# EAGLE board afron_atmega328_chassis_SMD (EAGLE 6.1)
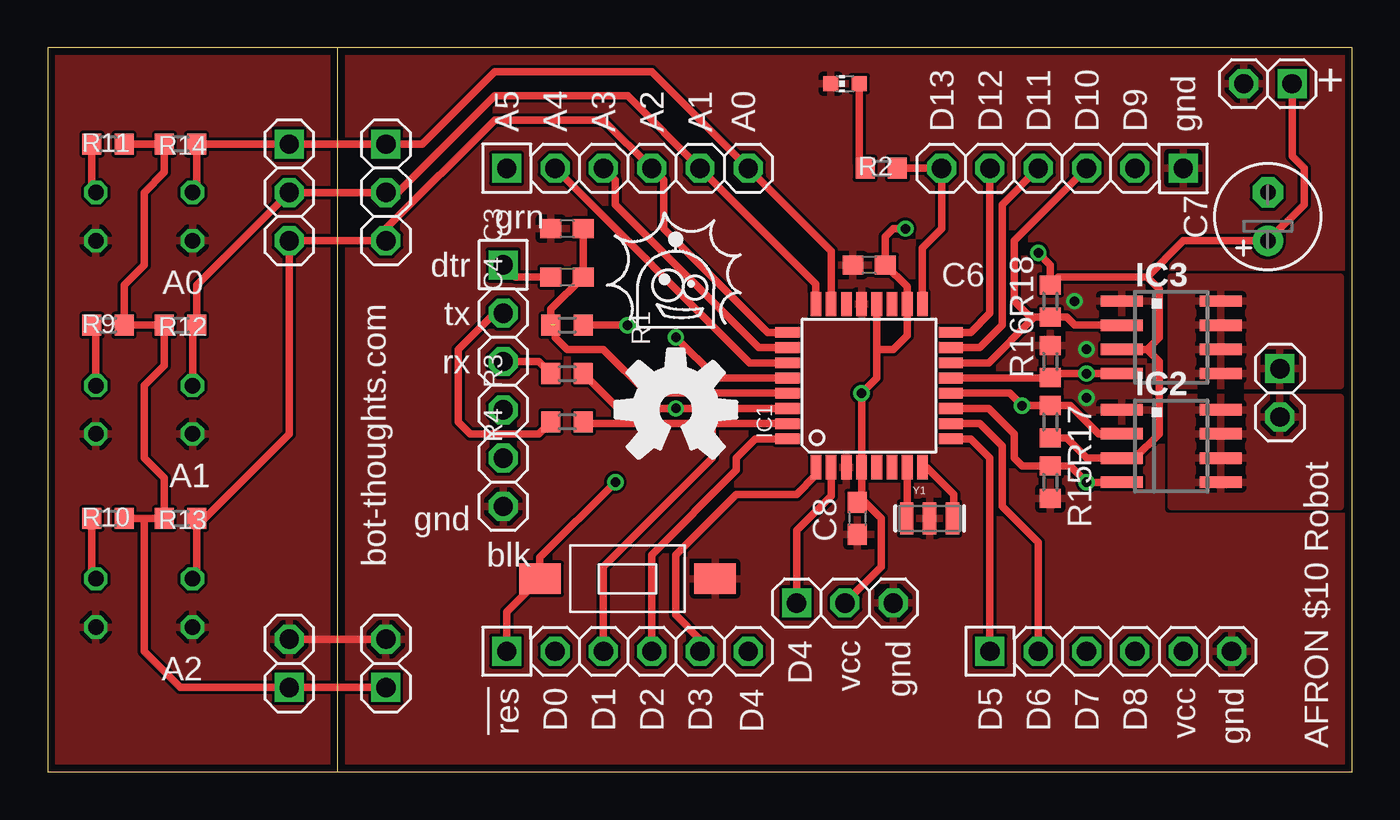
[diagram p0: board, top side]
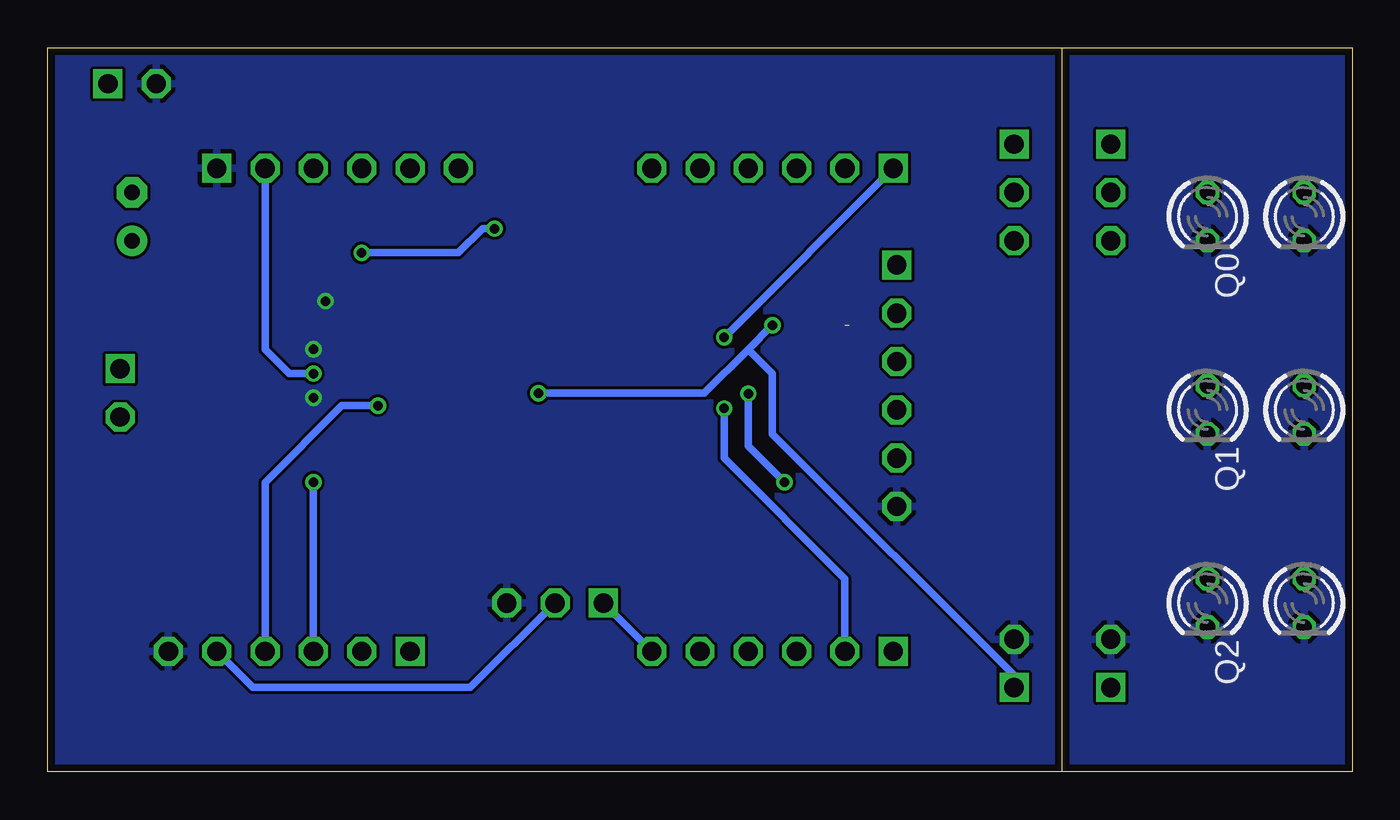
[diagram p1: board, bottom side, seen from below]

Size 68.58 x 38.1 mm. Coordinates in mm from the lower left corner, seen from the top.
Outline: 15.24,38.1 68.58,38.1 68.58,0 15.24,0
Outline: 15.24,38.1 0,38.1 0,0 15.24,0
Outline: 15.24,0 15.24,38.1
Copper layers (1*16): Top 0.0356mm / dielectric 1.5011mm / Bottom 0.0356mm
Design rules: minimum track width 6mil, minimum drill 13mil, track to track 6mil, track to pad 6mil, pad to pad 6mil, via to via 6mil, smd to smd 6mil, copper to edge 15mil, drill to drill 6mil, minimum pad ring 7mil, minimum via ring 7mil, stop-mask expansion 4mil, vias tented up to drill 0mil, thermal gap 10mil

## Footprints (pad centres in the part's own frame; a part is rotated, then mirrored left to right if it is on the bottom)
C0603 = smd 1.1 x 1: 1 -0.85,0; 2 0.85,0
E2,5-6 = drill 0.813 pad 1.6: + -1.27,0 | drill 0.813 pad 1.6 octagon: - 1.27,0
TQFP32-08 = smd 1.27 x 0.559: 1 -4.293,2.8; 2 -4.293,2; 3 -4.293,1.2; 4 -4.293,0.4; 5 -4.293,-0.4; 6 -4.293,-1.2; 7 -4.293,-2; 8 -4.293,-2.8; 17 4.293,-2.8; 18 4.293,-2; 19 4.293,-1.2; 20 4.293,-0.4; 21 4.293,0.4; 22 4.293,1.2; 23 4.293,2; 24 4.293,2.8 | smd 0.559 x 1.27: 9 -2.8,-4.293; 10 -2,-4.293; 11 -1.2,-4.293; 12 -0.4,-4.293; 13 0.4,-4.293; 14 1.2,-4.293; 15 2,-4.293; 16 2.8,-4.293; 25 2.8,4.293; 26 2,4.293; 27 1.2,4.293; 28 0.4,4.293; 29 -0.4,4.293; 30 -1.2,4.293; 31 -2,4.293; 32 -2.8,4.293
SOIC8 = smd 0.6 x 2.2: 1 -1.905,-2.6; 2 -0.635,-2.6; 3 0.635,-2.6; 4 1.905,-2.6; 5 1.905,2.6; 6 0.635,2.6; 7 -0.635,2.6; 8 -1.905,2.6
1X06-S = drill 1.016 square: 1 -6.35,0 | drill 1.016 octagon: 2 -3.81,0; 3 -1.27,0; 4 1.27,0; 5 3.81,0; 6 6.35,0
1X02-S = drill 1.016 square: 1 -1.27,0 | drill 1.016 octagon: 2 1.27,0
1X03-S = drill 1.016 square: 1 -2.54,0 | drill 1.016 octagon: 2 0,0; 3 2.54,0
LED3MM = drill 0.813 octagon: A -1.27,0; K 1.27,0
CHIP-LED0603 = smd 0.8 x 0.8: A 0,-0.75; C 0,0.75
R0603 = smd 1 x 1.1: 1 -0.85,0; 2 0.85,0
6MMTACTTILE_RECT_SMD = smd 2.19 x 1.6: P$1 -4.6,0; P$2 4.6,0
RESONATOR-SMD = smd 0.7 x 1.7: 1 -1.2,0; 2 0,0; 3 1.2,0

## Placement (x,y rotation side)
C3  0.1uF  [C0603]  27.3,28.57 180 top
C4  0.1uF  [C0603]  27.3,26.04 0 top
C6  0.1uF  [C0603]  43.18,26.67 180 top
C7  10uF  [E2,5-6]  64.14,29.21 90 top
C8  0.1uF  [C0603]  42.55,13.34 270 top
IC1  ATMEGA168-AU  [TQFP32-08]  43.18,20.32 90 top
IC2  FDS9934C  [SOIC8]  59.05,17.14 270 top
IC3  FDS9934C  [SOIC8]  59.05,22.86 270 top
J1  D  [1X06-S]  30.48,6.35 0 top
J2  C  [1X06-S]  55.88,6.35 0 top
J3  B  [1X06-S]  53.34,31.75 180 top
J4  A  [1X06-S]  30.48,31.75 0 top
J5  FTDI  [1X06-S]  23.95,20.32 270 top
JP1  PWR  [1X02-S]  12.7,5.71 90 top
JP2  MOT  [1X02-S]  64.77,19.94 270 top
JP3  SENS  [1X03-S]  12.7,30.48 270 top
JP4  PWR  [1X02-S]  64.14,36.2 180 top
JP5  SRV  [1X03-S]  41.91,8.89 0 top
JP6  PWR  [1X02-S]  17.78,5.71 90 top
JP7  SENS  [1X03-S]  17.78,30.48 270 top
LED0  [LED3MM]  2.54,29.21 270 bottom
LED1  [LED3MM]  2.54,19.05 270 bottom
LED2  [LED3MM]  2.54,8.89 270 bottom
LED4  [CHIP-LED0603]  41.91,36.2 90 top
Q0  [LED3MM]  7.62,29.21 270 bottom
Q1  [LED3MM]  7.62,19.05 270 bottom
Q2  [LED3MM]  7.62,8.89 270 bottom
R1  1K  [R0603]  27.3,23.5 0 top
R2  100  [R0603]  43.81,31.75 0 top
R3  1K  [R0603]  27.3,20.95 0 top
R4  1K  [R0603]  27.3,18.41 0 top
R9  100  [R0603]  3.17,23.5 0 top
R10  100  [R0603]  3.17,13.34 0 top
R11  100  [R0603]  3.17,33.02 0 top
R12  10K  [R0603]  6.99,23.5 180 top
R13  10K  [R0603]  6.99,13.34 180 top
R14  10K  [R0603]  6.99,33.02 180 top
R15  10K  [R0603]  52.7,15.24 270 top
R16  10K  [R0603]  52.7,21.59 90 top
R17  10K  [R0603]  52.7,18.41 270 top
R18  10K  [R0603]  52.7,24.77 90 top
S1  RESET  [6MMTACTTILE_RECT_SMD]  30.48,10.16 180 top
Y1  4MHz  [RESONATOR-SMD]  46.35,13.34 0 top

## Library data of the parts
C3 C4 C6-C8 = rcl
IC1 = Arduino-AVR
IC2 IC3 = mes_motor_driver
J1-J5 JP1-JP7 = pinhead-2
LED0 LED1 LED2 LED4 = led
Q0 Q1 Q2 = mes_opto
R1-R4 R9-R18 = resistor
S1 = mes_electromech
Y1 = SparkFun

## Nets
!RESET: C3.1 C4.2 IC1.29 J1.1 R1.1 S1.P$2
A0: IC1.23 J4.6 JP3.1 JP7.1 Q0.A R14.1
A1: IC1.24 J4.5 JP3.2 JP7.2 Q1.A R12.1
A2: IC1.25 J4.4 JP3.3 JP7.3 Q2.A R13.1
A3: IC1.26 J4.3
A4: IC1.27 J4.2
A5: IC1.28 J4.1
D0: IC1.30 J1.2 R3.2
D1: IC1.31 J1.3 R4.2
D2: IC1.32 J1.4
D3: IC1.1 J1.5
D4: IC1.2 J1.6 JP5.1
D5: IC1.9 J2.1
D6: IC1.10 J2.2
D7: IC1.11 IC2.4 J2.3 R15.1
D8: IC1.12 IC2.2 J2.4 R17.1
D9: IC1.13 IC3.4 J3.2 R16.1
D10: IC1.14 IC3.2 J3.3 R18.1
D11: IC1.15 J3.4
D12: IC1.16 J3.5
D13: IC1.17 J3.6 R2.2
GND: C3.2 C6.2 C8.2 IC1.3 IC1.21 IC2.1 IC3.1 J2.6 J3.1 J5.6 JP1.2 JP4.2 JP5.3 JP6.2 LED0.K LED1.K LED2.K LED4.C Q0.K Q1.K Q2.K R15.2 R16.2 S1.P$1 Y1.2
GND2: IC1.5
MA: IC2.5 IC2.6 IC2.7 IC2.8 JP2.2
MB: IC3.5 IC3.6 IC3.7 IC3.8 JP2.1
N$1: LED0.A R11.1
N$2: IC1.7 Y1.1
N$3: IC1.8 Y1.3
N$4: C4.1 J5.1
N$5: LED2.A R10.1
N$6: LED4.A R2.1
N$7: LED1.A R9.1
RX: J5.3 R3.1
TX: J5.2 R4.1
VCC: C6.1 C8.1 IC1.4 IC1.18 IC1.20 IC2.3 IC3.3 J2.5 JP1.1 JP4.1 JP5.2 JP6.1 R1.2 R9.2 R10.2 R11.2 R12.2 R13.2 R14.2 R17.2 R18.2
VCC2: IC1.6

## Tracks (layer width: path | path; a pad name or v marks a point on that pad's centre or on a via)
!RESET  (via drill 0.5)  (1 unrouted)
  Top 0.406: C3.1 C4.2 26.45,24.34 R1.1 | IC1.29 31.73,19.92 | 31.73,19.92 31.52,19.92 29.21,22.23 27.3,22.23 26.67,22.86 26.67,23.5 | J1.1 24.13,8.41 S1.P$2 25.88,11.28 v29.84,15.24 | v31.75,19.9 31.73,19.92
  Bottom 0.406: v29.84,15.24 31.75,17.14 v31.75,19.9
A0
  Top 0.406: Q0.A 7.83,30.7 R14.1 JP3.1 JP7.1 19.68,33.02 23.5,36.83 31.75,36.83 J4.6 41.18,27.4 IC1.23
A1
  Top 0.406: Q1.A 7.62,23.28 R12.1 7.83,25.61 JP3.2 JP7.2 18.41,30.48 23.5,35.56 30.48,35.56 J4.5 40.38,25.66 IC1.24
A2
  Top 0.406: Q2.A 7.83,10.38 R13.1 8.26,13.34 12.7,17.78 JP3.3 JP7.3 17.78,28.57 23.5,34.29 29.21,34.29 J4.4 32.38,31.11 32.38,28.57 37.84,23.12 IC1.25
A3
  Top 0.406: IC1.26 37.37,22.32 29.84,29.84 29.84,31.11 J4.3
A4
  Top 0.406: IC1.27 36.9,21.52 J4.2
A5  (via drill 0.5)
  Top 0.406: IC1.28 35.16,20.72 v33.02,22.86
  Bottom 0.406: v33.02,22.86 J4.1
D0  (via drill 0.5)
  Top 0.406: R3.2 29.99,19.12 v33.02,19.12 IC1.30
  Bottom 0.406: J1.2 26.67,10.16 33.02,16.51 v33.02,19.12
D1
  Top 0.406: IC1.31 34.92,18.32 | 34.92,18.32 28.25,18.32 R4.2 | J1.3 29.21,10.79 34.92,16.51 34.92,18.32
D2
  Top 0.406: J1.4 31.75,11.43 36.2,15.88 36.2,16.51 37.2,17.52 IC1.32
D3
  Top 0.406: J1.5 34.29,6.99 33.02,8.26 33.02,11.43 36.2,14.61 39.37,14.61 40.38,15.62 IC1.1
D4
  Top 0.406: IC1.2 41.18,14.51 39.37,12.7 JP5.1
  Bottom 0.406: J1.6 JP5.1
D5
  Top 0.406: IC1.9 48.52,17.52 49.53,16.51 J2.1
D6
  Top 0.406: IC1.10 48.99,18.32 50.16,17.14 50.16,13.97 52.07,12.06 J2.2
D7  (via drill 0.5)
  Top 0.406: IC2.4 v54.61,15.24 53.76,16.09 R15.1 51.22,16.09 50.8,16.51 50.8,17.78 49.46,19.12 IC1.11
  Bottom 0.406: v54.61,15.24 J2.3
D8  (via drill 0.5)
  Top 0.406: IC2.2 55.24,17.78 53.76,19.27 R17.1 v51.22,19.27 50.56,19.92 IC1.12
  Bottom 0.406: v51.22,19.27 53.12,19.27 57.15,15.24 J2.4
D9  (via drill 0.5)
  Top 0.406: IC1.13 52.69,20.72 R16.1 52.92,20.95 v54.61,20.95 IC3.4
  Bottom 0.406: J3.2 57.15,22.23 55.88,20.95 v54.61,20.95
D10
  Top 0.406: IC3.2 53.98,23.5 53.55,23.91 R18.1 51.85,23.91 51.75,23.81 | 51.75,23.81 49.46,21.52 IC1.14 | J3.3 50.8,27.94 50.8,24.77 51.75,23.81
D11
  Top 0.406: IC1.15 48.99,22.32 50.16,23.5 50.16,29.84 J3.4
D12
  Top 0.406: IC1.16 48.52,23.12 49.53,24.13 J3.5
D13
  Top 0.406: IC1.17 45.98,27.57 46.99,28.57 J3.6 R2.2
GND  (via drill 0.5)
  Top 0.406: JP1.2 JP6.2
  other vias: 54.61,19.68 53.98,24.77 54.61,22.23
  pour Bottom (rank 3): 0,0 0,38.42 68.58,38.42 68.58,0
  pour Top (rank 2): 0,38.1 68.58,38.1 68.58,0 0,0
MA
  pour Top: 59.05,19.68 59.05,13.97 67.94,13.97 67.94,19.68
MB
  pour Top: 67.94,26.04 59.05,26.04 59.05,20.32 67.94,20.32
N$1
  Top 0.406: R11.1 2.33,30.7 LED0.A
N$2
  Top 0.406: IC1.7 45.18,13.36 Y1.1
N$3
  Top 0.406: IC1.8 46.2,16.03 47.62,14.61 47.62,13.4 Y1.3
N$4
  Top 0.406: C4.1 24.58,26.04 J5.1
N$5
  Top 0.406: R10.1 2.33,10.38 LED2.A
N$6
  Top 0.406: LED4.A 42.66,32.05 R2.1
N$7
  Top 0.406: LED1.A 2.54,23.28 R9.1
RX
  Top 0.406: J5.3 25.82,21.59 R3.1
TX
  Top 0.406: J5.2 23.5,24.13 21.59,22.23 21.59,18.41 22.23,17.78 25.82,17.78 R4.1
VCC  (via drill 0.5)
  Top 0.406: R17.2 53.55,17.57 54.61,16.51 IC2.3 57.15,16.51 58.42,17.78 58.42,21.59 57.78,22.23 | IC3.3 57.78,22.23 | 57.78,22.23 58.42,22.86 58.42,25.4 57.78,26.04 | 57.78,26.04 53.12,26.04 R18.2 52.7,26.67 v52.07,27.3 | R11.2 R14.2 6.13,31.54 5.08,30.48 5.08,26.67 4.03,25.61 R9.2 R12.2 6.13,21.38 5.08,20.32 5.08,16.51 6.13,15.46 R13.2 5.08,13.34 | R10.2 5.08,13.34 | 5.08,13.34 5.08,6.35 6.99,4.45 JP1.1 JP6.1 | JP5.2 43.81,10.79 43.81,13.34 42.97,14.19 C8.1 42.78,14.42 IC1.4 v42.78,19.92 43.58,20.72 43.58,22.23 | IC1.20 43.58,22.23 | 43.58,22.23 44.45,22.23 45.18,22.95 IC1.18 45.18,25.52 C6.1 44.03,28.16 44.45,28.57 v45.09,28.57 | 57.78,26.04 59.69,27.94 64.14,27.94 66.04,29.84 66.04,31.75 65.41,32.38 JP4.1 | v30.48,23.5 R1.2
  Bottom 0.406: J2.5 57.78,4.45 46.35,4.45 JP5.2 | v42.78,19.92 34.05,19.92 31.75,22.23 | 31.75,22.23 v30.48,23.5 | JP6.1 17.78,5.08 30.48,17.78 30.48,20.95 31.75,22.23 | v52.07,27.3 46.99,27.3 45.72,28.57 v45.09,28.57

## Text on the board
tPlace: bot-thoughts.com | AFRON $10 Robot
tNames: + | A5 | A4 | A3 | A2 | A1 | A0 | D13 | D12 | D11 | D10 | D9 | gnd | grn | dtr | A0 | tx | rx | A1 | gnd | blk | D4 | vcc | gnd | A2 | !res | D0 | D1 | D2 | D3 | D4 | D5 | D6 | D7 | D8 | vcc | gnd